# Altium PCB PCBMain.PcbDoc
Units mm, origin at the board's own origin, x right, y up, seen from the top; angles counter-clockwise.
Board outline 60.25 x 110.25 mm, 2 copper layers (Top Layer, Bottom Layer); 105 components, 104 nets, 344 pads, 33 vias.
Unrouted connection lines stored in the file: 4.
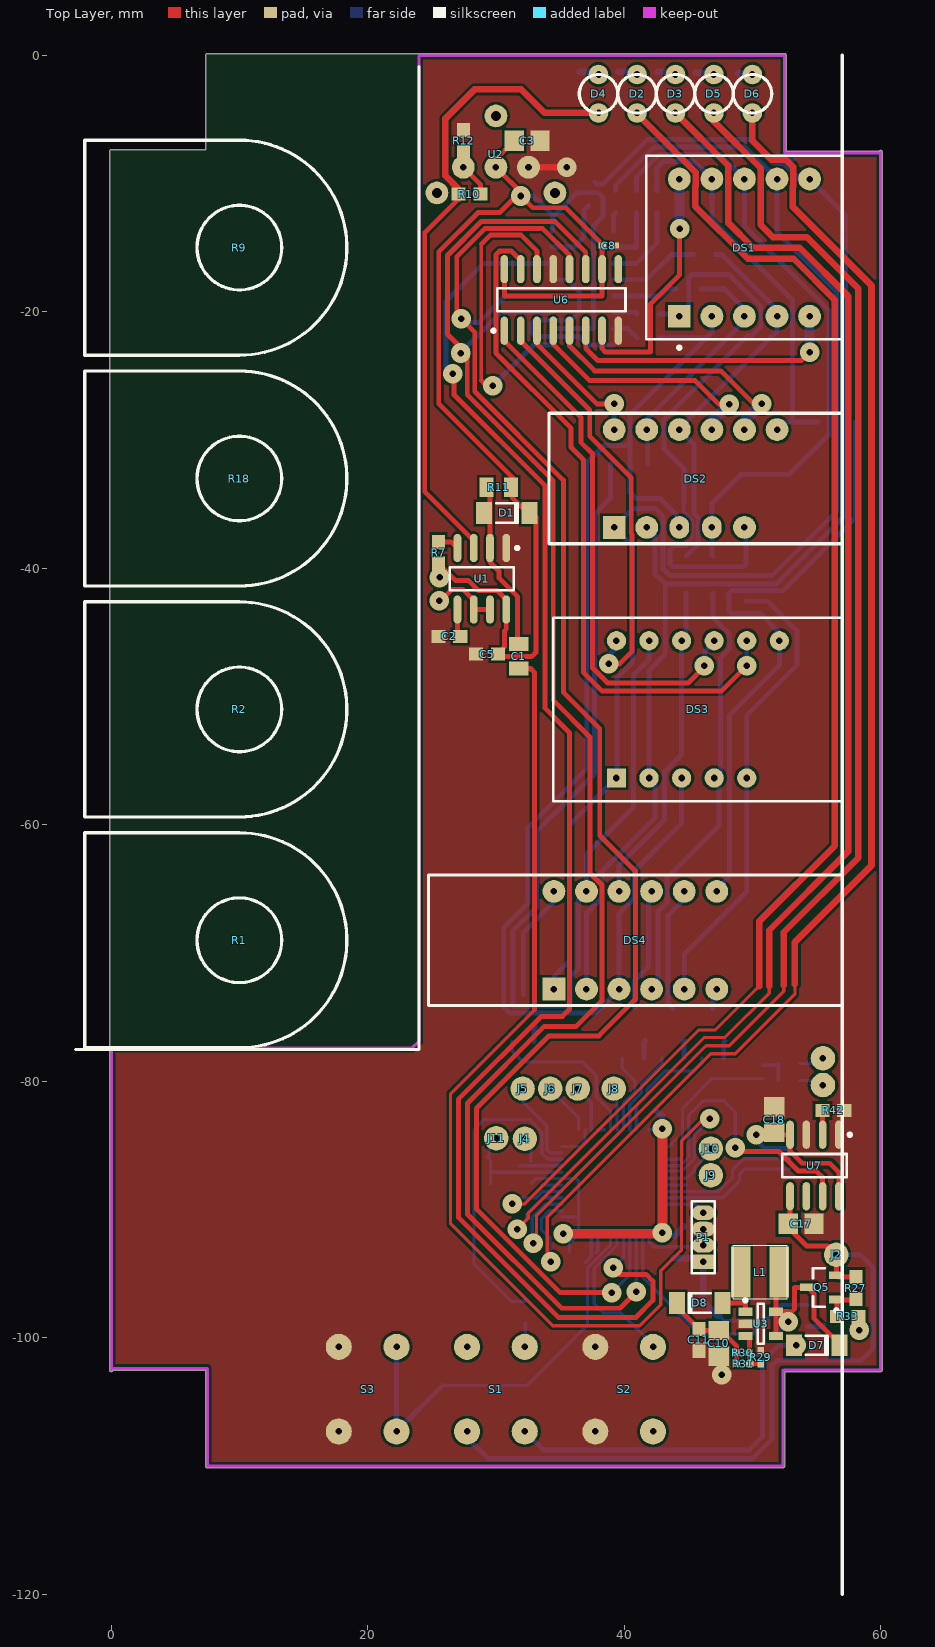
[diagram p0: Top Layer view]
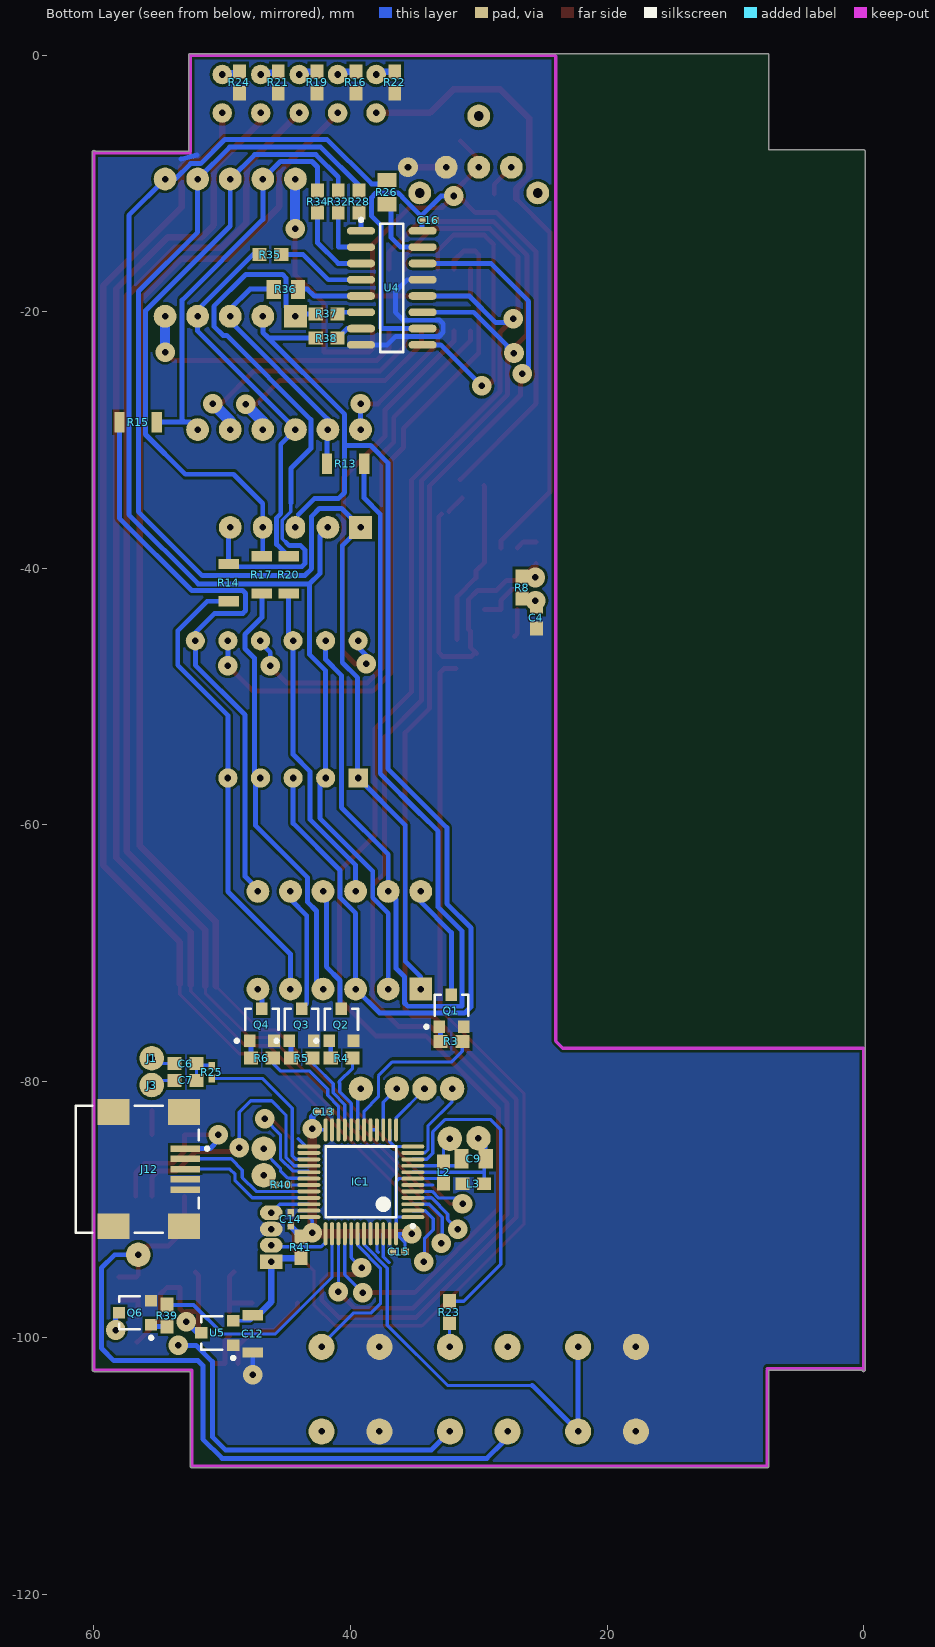
[diagram p1: Bottom Layer view, seen from below]

## Layer stack, top to bottom
Top Solder: solder mask 0.0102, Solder Resist, Dk 3.5
Top Layer: signal copper 0.0356
Dielectric 1: dielectric 0.32, FR-4, Dk 4.8
Bottom Layer: signal copper 0.0356
Bottom Solder: solder mask 0.0102, Solder Resist, Dk 3.5

## Board outline
7.373,-110 7.373,-102.507 0.127,-102.507 cw(c0,-102.5) -0.127,-102.5 -0.127,-7.5 cw(c0,-7.5) 0,-7.373 7.373,-7.373 7.373,0 cw(c7.5,0) 7.5,0.127 52.451,0.127 cw(c52.451,0) 52.475,0.125 52.476,0.125 cw(c52.5,0) 52.627,0 52.627,-7.493 59.886,-7.493 cw(c60,-7.549) 60.127,-7.549 60.127,-102.38 cw(c60,-102.38) 60.112,-102.44 cw(c60,-102.5) 60.127,-102.5 cw(c60,-102.5) 60,-102.627 52.507,-102.627 52.507,-110 cw(c52.38,-110) 52.38,-110.127 7.5,-110.127 cw(c7.5,-110)

## Design rules (kind name [scope] priority, off if disabled: settings)
Clearance [All] p1: gap=0.127 except(0.216: Arc-Poly Track-Poly SMDPad-Poly THPad-Poly Via-Poly Fill-Poly Poly-Poly)
ComponentClearance [All] p1 off: gap=0.254 collisioncheckmode=3 verticalgap=0.254 showdistances=FALSE
PlaneConnect [All] p1: planeconnectstyle=Direct reliefexpansion=0.508 reliefentries=4 reliefconductorwidth=0.254 reliefairgap=0.254
PolygonConnect [All] p1: connectstyle=Direct reliefconductorwidth=0.254 reliefentries=4 polygonreliefangle="90 Angle" airgapwidth=0.254
RoutingVias [All] p1: holewidth=0.508 width=1.524 viastyle="Through Hole" minholewidth=0.508 minwidth=1.524 maxholewidth=0.508 maxwidth=1.524
SolderMaskExpansion [All] p1: expansion=0.102
Width [All] p1: maxlimit=3.81 minlimit=0.203 preferedwidth=0.381
28 further rules are at their usual default settings.

## Components (designator, comment, footprint, x,y, rotation, side; value= is the part's Value field where it differs from the comment)
C1 "Cap" 0805x 31.775,-46.863 r90 top
C2 "Cap" ERA-0603 26.365,-45.314 r0 top
C3 "Cap" 1206xx 32.436,-6.68 r0 top
C4 "Cap" ERA-0603 25.502,-43.84 r270 bottom
C5 "Cap" ERA-0603 29.312,-46.685 r180 top
C6 "Cap" ERA-0603 52.857,-78.613 r180 bottom
C7 "Cap" ERA-0603 52.857,-79.934 r180 bottom
C8 "Cap" 0402 38.811,-14.834 r0 top
C9 "Cap" 0805x 30.404,-86.03 r180 bottom
C10 "Cap" 1206xx 47.371,-100.432 r270 top
C11 "Cap" ERA-0603 45.822,-100.152 r270 top
C12 "Cap" 1206x 47.625,-99.695 r270 bottom
C13 "Cap" 0402 42.088,-82.372 r180 bottom
C14 "Cap" 0402 44.653,-90.754 r90 bottom
C15 "Cap" 0402 36.246,-93.294 r0 bottom
C16 "Cap" 0402 33.934,-12.852 r180 bottom
C17 "Cap" 1206xx 53.797,-91.11 r0 top
C18 "Cap" 1206xx 51.689,-82.982 r90 top
D1 "Diode" SOD80C 30.861,-35.687 r0 top
D2 "Diode" LED3mm 41,-3 r90 top
D3 "Diode" LED3mm 44,-3 r90 top
D4 "Diode" LED3mm 38,-3 r90 top
D5 "Diode" LED3mm 47,-3 r90 top
D6 "Diode" LED3mm 50,-3 r90 top
D7 "Diode" SOD80C 55.016,-100.584 r0 top
D8 "Diode" SOD80C 45.898,-97.282 r180 top
DS1 "RED" HDSM-577 49.377,-15 r0 top
DS2 "RED" 7seg_3x_small 45.57,-33 r0 top
DS3 "GREEN" 7SEG_3X_MEDIUM 45.749,-51 r0 top
DS4 "GREEN" 7seg_4x_small 40.871,-69 r0 top
IC1 "STM32F103C6T6" TQFP48_N 39.192,-87.833 r0 bottom
J1 "Socket" PAD#1 55.499,-78.207 r180 bottom
J2 "Socket" PAD#1 56.54,-93.523 r0 top
J3 "Socket" PAD#1 55.499,-80.289 r180 bottom
J4 "Socket" PAD#1 32.258,-84.48 r90 top
J5 "Socket" PAD#2 32.08,-80.569 r0 top
J6 "Socket" PAD#2 34.231,-80.569 r0 top
J7 "Socket" PAD#2 36.381,-80.569 r0 top
J8 "Socket" PAD#2 39.192,-80.569 r0 top
J9 "Socket" PAD#1 46.761,-87.325 r0 top
J10 "Socket" PAD#1 46.761,-85.242 r0 top
J11 "Socket" PAD#1 30.023,-84.43 r90 top
J12 "440247-1" 440247 60.731,-86.843 r0 bottom
L1 "Inductor" IND_SMD_1 50.597,-94.869 r180 top
L2 "Res1" ERA-0603 32.741,-87.097 r270 bottom
L3 "Res1" ERA-0603 30.429,-87.986 r180 bottom
P1 "Header 4" MHDR1X4 46.177,-94.056 r90 top
Q1 "BC847ALT1" 318-08 32.131,-74.498 r180 bottom
Q2 "BC847ALT1" 318-08 40.716,-75.59 r180 bottom
Q3 "BC847ALT1" 318-08 43.815,-75.59 r180 bottom
Q4 "BC847ALT1" 318-08 46.914,-75.59 r180 bottom
Q5 "IRLML5103" SOT-23_N 55.423,-96.063 r180 top
Q6 "BC847ALT1" 318-08 56.794,-98.044 r90 bottom
R1 "Res Tap" RES_VAR_MEDIUM 10,-69 r90 top
R2 "Res Tap" RES_VAR_MEDIUM 10,-51 r90 top
R3 "Res1" ERA-0603 32.131,-76.886 r0 bottom
R4 "Res1" ERA-0603 40.691,-78.181 r0 bottom
R5 "Res1" ERA-0603 43.802,-78.181 r0 bottom
R6 "Res1" ERA-0603 46.914,-78.181 r0 bottom
R7 "Res1" ERA-0603 25.527,-38.786 r270 top
R8 "Res1" ERA-0603 26.619,-41.504 r270 bottom
R9 "Res Tap" RES_VAR_MEDIUM 10,-15 r90 top
R10 "Res1" ERA-0603 27.94,-10.82 r180 top
R11 "Res1" 0805x 30.226,-33.68 r180 top
R12 "Res1" ERA-0603 27.483,-6.68 r270 top
R13 "Res1" 1206x 40.386,-31.852 r0 bottom
R14 "Res1" 1206x 49.505,-41.123 r90 bottom
R15 "Res1" 1206x 56.566,-28.6 r180 bottom
R16 "Res1" ERA-0603 39.58,-2.108 r270 bottom
R17 "Res1" 1206x 46.914,-40.513 r90 bottom
R18 "Res Tap" RES_VAR_MEDIUM 10,-33 r90 top
R19 "Res1" ERA-0603 42.608,-2.108 r270 bottom
R20 "Res1" 1206x 44.831,-40.513 r90 bottom
R21 "Res1" ERA-0603 45.637,-2.108 r270 bottom
R22 "Res1" ERA-0603 36.551,-2.108 r90 bottom
R23 "Res1" ERA-0603 32.283,-97.993 r90 bottom
R24 "Res1" ERA-0603 48.666,-2.108 r270 bottom
R25 "Res1" 0402 50.825,-79.273 r270 bottom
R26 "Res1" 0805x 37.16,-10.668 r270 bottom
R27 "Res1" ERA-0603 58.064,-96.114 r270 top
R28 "Res1" ERA-0603 39.336,-11.405 r90 bottom
R29 "Res1" 0402 50.648,-101.498 r270 top
R30 "Res1" 0402 49.251,-101.168 r180 top
R31 "Res1" 0402 49.276,-102.006 r180 top
R32 "Res1" ERA-0603 40.953,-11.405 r90 bottom
R33 "Res1" ERA-0603 57.429,-98.323 r180 top
R34 "Res1" ERA-0603 42.57,-11.405 r90 bottom
R35 "Res1" ERA-0603 46.253,-15.545 r0 bottom
R36 "Res1" 0805x 45.034,-18.263 r180 bottom
R37 "Res1" ERA-0603 41.859,-20.168 r0 bottom
R38 "Res1" ERA-0603 41.859,-22.047 r0 bottom
R39 "Res1" ERA-0603 54.305,-98.273 r90 bottom
R40 "Res1" 0402 45.39,-88.062 r0 bottom
R41 "Res1" ERA-0603 43.866,-92.939 r90 bottom
R42 "Res1" ERA-0603 56.312,-82.271 r180 top
S1 "SW-SPST" BTN_STD 30,-104 r90 top
S2 "SW-SPST" BTN_STD 40,-104 r90 top
S3 "SW-SPST" BTN_STD 20,-104 r90 top
U1 "LMC555CM" M08A_N 28.905,-40.818 r270 top
U2 "optolink" optolink 30,-8.73 r0 top
U3 "LT1931AES5#TR" S5-T_N 50.648,-98.908 r0 top
U4 "SN74HC595D" D016_N 36.779,-18.136 r180 bottom
U5 "LM78M05CT" 318-08 50.394,-99.619 r90 bottom
U6 "SN74HC595D" D016_N 35.103,-19.075 r90 top
U7 "TP4056" NSO8_N 54.839,-86.563 r270 top

## Footprints (in the part's own frame and the unit in brackets; to place one, negate y for a bottom-side part, rotate by r counter-clockwise, add the part's x,y. Pads: shape width x height; smd on the part's side, far side on the other; paste and mask are expansions set on the pad)
7SEG_3X_MEDIUM [mm] "LED, 7-Segment Display, 9.2 mm, Dual Digit; 10 Leads; Row Space 10.7 mm; Pitch 2.54 mm"
  rect 1.5x1.5 hole 0.508 unplated: 1(-6.35,-5.35)
  round 1.5 hole 0.508 unplated: 2(-3.81,-5.35) 3(-1.27,-5.35) 4(1.27,-5.35) 5(3.81,-5.35) 7(6.35,5.35) 8(3.81,5.35) 9(1.27,5.35) 10(-1.27,5.35) 11(-3.81,5.35) 12(-6.35,5.35)
  silkscreen extent -11.28,-7.15 11.28,7.15
7seg_3x_small [mil]
  rect 70x70 hole 20 unplated: 1(-250,-150)
  round 70 hole 20 unplated: 2(-150,-150) 5(150,-150) 7(250,150) 8(150,150) 9(50,150) 10(-50,150) 11(-150,150) 12(-250,150)
  oval 60x70 hole 20 unplated: 3(-50,-150) 4(50,-150)
  silkscreen extent -450,-200 450,200, body extent -450,-200 450,200, height 228
7seg_4x_small [mil]
  rect 70x70 hole 20 unplated: 1(-250,-150)
  round 70 hole 20 unplated: 2(-150,-150) 3(-50,-150) 4(50,-150) 5(150,-150) 6(250,-150) 7(250,150) 8(150,150) 9(50,150) 10(-50,150) 11(-150,150) 12(-250,150)
  silkscreen extent -635,-200 635,200, body extent -635,-200 635,200, height 228
318-08 [mm] "SOT-23; 3 Leads; Body 3.0 x 2.6 mm, inc. leads (LxW max)"
  rect 0.9x0.95 smd: 1(-0.95,-1.25) 2(0.95,-1.25) 3(0,1.25)
  silkscreen extent -2.08,-1.37 1.3,1.25
0402 [mm] "Chip Capacitor, Body 1.0x0.5mm, IPC High Density"
  rect 0.6x0.5 smd: 1(-0.5,0) 2(0.5,0)
  body extent -0.55,-0.3 0.55,0.3, height 1.3
0805x [mm] "Chip Resistor; Body 2 x 1.3 mm (LxW typ)"
  rect 1.1x1.5 smd: 1(0.95,0) 2(-0.95,0)
1206x [mm]
  rect 0.8x1.6 smd: 1(-1.45,0) 2(1.45,0)
1206xx [mm]
  rect 1.5x1.6 smd: 1(-1,0) 2(1,0)
440247 [mm] "Connector; USB2.0, Type B, SM; 5 Position; Right Angle"
  rect 2.3x0.5 smd: 1(-7.85,-1.6) 2(-7.85,-0.8) 3(-7.85,0) 4(-7.85,0.8) 5(-7.85,1.6)
  rect 2.5x2 smd: 6(-7.75,4.45) 7(-2.25,4.45) 8(-7.75,-4.45) 9(-2.25,-4.45)
  round 0 all layers, no hole: MH1(-5.25,2.2) MH2(-5.25,-2.2)
  silkscreen extent -9.67,-4.95 0.7,4.95
BTN_STD [mil]
  round 80 hole 20 unplated: 1(-129.92,88.58) 1(129.92,88.58) 2(-129.92,-88.58) 2(129.92,-88.58)
D016_N [mm] "SOIC, 16-Leads, Body 9.9x3.9mm, Pitch 1.27mm, IPC Medium Density"
  oval 2.2x0.6 smd: 1(-2.4,4.445) 2(-2.4,3.175) 3(-2.4,1.905) 4(-2.4,0.635) 5(-2.4,-0.635) 6(-2.4,-1.905) 7(-2.4,-3.175) 8(-2.4,-4.445) 9(2.4,-4.445) 10(2.4,-3.175) 11(2.4,-1.905) 12(2.4,-0.635) 13(2.4,0.635) 14(2.4,1.905) 15(2.4,3.175) 16(2.4,4.445)
  silkscreen extent -2.53,-5 0.9,5.42, body extent -1.95,-4.95 1.95,4.95, height 1.75
ERA-0603 [mm] "Chip Resistor; Body 1.6 x 0.8 mm (LxW typ)"
  rect 1.1x1 smd: 1(-0.85,0) 2(0.85,0)
HDSM-577 [mil] "LED, 7-Segment Display, 9.2 mm, Dual Digit; 10 Leads; Row Space 10.7 mm; Pitch 2.54 mm"
  rect 70x70 hole 20 unplated: 1(-200,-210.63)
  round 70 hole 20 unplated: 2(-100,-210.63) 3(0,-210.63) 4(100,-210.63) 5(200,-210.63) 6(200,210.63) 7(100,210.63) 8(0,210.63) 9(-100,210.63) 10(-200,210.63)
  silkscreen extent -301,-312 301,281
IND_SMD_1 [mm]
  rect 1.5x4 smd: 1(-1.5,0) 2(1.5,0)
  silkscreen extent -2.1,-2.1 2.1,2.1, body extent -2.03,-2.03 2.03,2.03, height 2
LED3mm [mil]
  round 60 hole 20: 1(-59.06,0) 2(59.06,0)
  silkscreen extent -59,-59 59,59
M08A_N [mm] "SOIC, 8-Leads, Body 4.9x3.9mm, Pitch 1.27mm, IPC Medium Density"
  oval 2.2x0.6 smd: 1(-2.4,1.905) 2(-2.4,0.635) 3(-2.4,-0.635) 4(-2.4,-1.905) 5(2.4,-1.905) 6(2.4,-0.635) 7(2.4,0.635) 8(2.4,1.905)
  silkscreen extent -2.52,-2.5 0.9,2.88, body extent -2,-2.5 2,2.5, height 1.75
MHDR1X4 [mil] "Connector; Header; 4 Position"
  rect 45x70 hole 20: 1(0,0)
  oval 45x70 hole 20: 2(50,0) 4(150,0)
  oval 45x70 hole 20 unplated: 3(100,0)
  silkscreen extent -35,-35 185,35
NSO8_N [mm] "SOIC, 8-Leads, Body 4.9x3.9mm, Pitch 1.27mm, IPC Medium Density"
  oval 2.2x0.6 smd: 1(-2.4,1.905) 2(-2.4,0.635) 3(-2.4,-0.635) 4(-2.4,-1.905) 5(2.4,-1.905) 6(2.4,-0.635) 7(2.4,0.635) 8(2.4,1.905)
  silkscreen extent -2.52,-2.5 0.9,2.88, body extent -2,-2.5 2,2.5, height 1.75
optolink [mil]
  round 70 hole 20 unplated: 1(-100,0) 2(0,0) 3(100,0)
  round 70 hole 30: 4(-181.1,-78.74) 5(0,157.48) 5(181.1,-78.74)
PAD#1 [mil]
  round 75 hole 20: 1(0,0)
PAD#2 [mil]
  round 75 hole 20 unplated: 1(0,0)
RES_VAR_MEDIUM [mm]
  silkscreen extent -8.38,-8.38 8.38,12.06
S5-T_N [mm] "SOT23, 5-Leads, Body 3x1.6mm, Pitch 0.95mm, Lead Span 2.8mm, IPC Medium Density"
  rect 1.1x0.65 smd: 1(-1.2,0.95) 2(-1.2,0) 3(-1.2,-0.95) 4(1.2,-0.95) 5(1.2,0.95)
  silkscreen extent -1.32,-1.55 0.25,1.95, body extent -0.9,-1.55 0.9,1.55, height 1
SOD80C [mm] "Metal Electrode Face (MELF) Diode; Body 3.5 x 1.6 mm (LxDia)"
  rect 1.25x1.7 smd: 1(-1.775,0) 2(1.775,0)
  silkscreen extent -0.85,-0.75 0.85,0.75
SOT-23_N [mm] "SOT23, 3-Leads, Body 2.9x1.3mm, Pitch 0.95mm, Lead Span 2.3mm, IPC Medium Density"
  rect 1.15x0.6 smd: 1(-1.125,0.95) 2(-1.125,-0.95) 3(1.125,0)
  silkscreen extent -1.25,-1.5 0.7,1.92, body extent -0.7,-1.5 0.7,1.5, height 1.11
TQFP48_N [mm] "Thin QFP, 48-Leads, Body 7x7mm, Pitch 0.5mm, IPC Medium Density"
  oval 1.8x0.3 smd: 1(-4.05,2.75) 2(-4.05,2.25) 3(-4.05,1.75) 4(-4.05,1.25) 5(-4.05,0.75) 6(-4.05,0.25) 7(-4.05,-0.25) 8(-4.05,-0.75) 9(-4.05,-1.25) 10(-4.05,-1.75) 11(-4.05,-2.25) 12(-4.05,-2.75) 25(4.05,-2.75) 26(4.05,-2.25) 27(4.05,-1.75) 28(4.05,-1.25) 29(4.05,-0.75) 30(4.05,-0.25) 31(4.05,0.25) 32(4.05,0.75) 33(4.05,1.25) 34(4.05,1.75) 35(4.05,2.25) 36(4.05,2.75)
  oval 0.3x1.8 smd: 13(-2.75,-4.05) 14(-2.25,-4.05) 15(-1.75,-4.05) 16(-1.25,-4.05) 17(-0.75,-4.05) 18(-0.25,-4.05) 19(0.25,-4.05) 20(0.75,-4.05) 21(1.25,-4.05) 22(1.75,-4.05) 23(2.25,-4.05) 24(2.75,-4.05) 37(2.75,4.05) 38(2.25,4.05) 39(1.75,4.05) 40(1.25,4.05) 41(0.75,4.05) 42(0.25,4.05) 43(-0.25,4.05) 44(-0.75,4.05) 45(-1.25,4.05) 46(-1.75,4.05) 47(-2.25,4.05) 48(-2.75,4.05)
  silkscreen extent -4.17,-2.75 2.75,3.57, body extent -3.5,-3.5 3.5,3.5, height 1.2

## Part data
C1 C2 C3 C4 C5 C6 C7 C8 C9 C10 C11 C12 C13 C14 C15 C16 C17 C18: "Capacitor"
D1 D2 D3 D4 D5 D6 D7 D8: "Default Diode"
DS1: library part HDSM-577G, "9.2 mm Green 7-Segment Display: 2-Digit, RH DP"
DS2 DS3 DS4: library part HDSP-B42G, "14.22 mm Tinted Green, 18:88 4-Digit 7-Segment Display: CA, Neutral Gray Surface"
J12: "USB 2.0, Right Angle, SMT, B Type, Receptacle, 5 Position, Black"
L2 L3 R3 R4 R5 R6 R7 R8 R10 R11 R12 R13 R14 R15 R16 R17 R19 R20 R21 R22 R23 R24 R25 R26 R27 R28 R29 R30 R31 R32 R33 R34 R35 R36 R37 R38 R39 R40 R41 R42: "Resistor"
P1: "Header, 4-Pin"
Q1 Q2 Q3 Q4 Q6: "General Purpose Transistor NPN Silicon"
Q5: "HEXFET Power MOSFET"
R1 R2 R9 R18: "Tapped Resistor"
S1 S2 S3: "Single-Pole, Single-Throw Switch"
U1: "CMOS Timer, 8-pin Narrow SOIC"
U3: "2.2MHz Inverting Current Mode DC/DC Converter"
U4 U6: "8-Bit Shift Register with 3-State Output Registers"
U5: "3-Terminal Positive Voltage Regulators, 3-pin TO-220"

## Via types
v1: diameter 1.524, hole 0.508, Top Layer to Bottom Layer, 33 vias

## Nets (pads, with @x,y where several pads share a name; then routed paths per layer and width w, separated by ;. In a path a pad name is that pad's centre, name@x,y a point inside that pad or via, vN(x,y) a via of type N, cw(c..) or ccw(c..) an arc to the next point about the centre after c; other vN are vias at no path point)
1: DS1.10 U6.7 | length 19.7
  Top Layer w0.381: U6.7 38.278,-22.885 38.532,-23.139 42.062,-23.139 42.062,-19.38 44.323,-17.12 v1(44.323,-13.513)
  Bottom Layer w0.762: DS1.10 44.323,-9.676 v1(44.323,-13.513)
2: DS1.6 DS2.2 DS3.2 DS4.2 R26.2 | length 102.7
  Bottom Layer w0.381: DS4.2 37.061,-66.896 38.268,-65.69 38.268,-63.612 42.393,-59.487 42.393,-56.803 DS3.2 41.939,-55.362 41.935,-55.358 41.935,-47.981 43.205,-46.711 43.205,-41.224 ; R26.2@37.719,-9.906 37.846,-10.033 38.359,-10.033 41.839,-6.553 49.784,-6.553 51.674,-8.444 52.462,-8.444 53.668,-9.65 DS1.6 57.277,-12.47 57.277,-35.814 51.88,-41.212 ; DS2.2 42.393,-37.443 42.393,-40.411 43.205,-41.224 ; 51.892,-41.224 43.205,-41.224
3: DS1.7 DS2.1 DS3.1 DS4.1 R28.2 | length 106.8
  Bottom Layer w0.381: DS4.1 34.521,-71.854 35.728,-70.648 35.728,-60.022 DS3.1 39.446,-56.303 39.446,-48.539 40.64,-47.346 40.64,-38.23 DS2.1 40.699,-35.331 42.418,-35.331 43.028,-35.941 43.028,-40.03 43.561,-40.564 51.537,-40.564 ; R28.2 39.336,-10.143 42.316,-7.163 49.43,-7.163 DS1.7 51.917,-13.792 56.54,-18.415 56.54,-35.585 51.549,-40.576
4: DS1.8 DS2.4 R17.2 R32.2 | length 49.2
  Bottom Layer w0.381: R32.2 40.953,-9.491 42.697,-7.747 47.474,-7.747 DS1.8 49.377,-13.309 55.982,-19.914 55.982,-29.566 52.883,-32.664 49.124,-32.664 46.84,-34.948 DS2.4 46.84,-38.989 R17.2
5: DS1.9 DS2.7 R15.2 R34.2 | length 31.9
  Bottom Layer w0.381: R34.2 42.57,-8.712 43.002,-8.28 45.467,-8.28 DS1.9 46.837,-12.801 53.124,-19.088 53.124,-28.436 52.959,-28.6 ; DS2.7 52.51,-28.6 52.959,-28.6 ; R15.2 52.959,-28.6
5V: C3.1 C5.1 C8.1 C16.1 D1.2 R7.2 R8.1 R11.2 U1.8 U2.2 U4.10 U4.16 U6.10 U6.16 | length 106.6
  Top Layer w0.381: v1@25.527,-40.716 R7.2 26.836,-40.945 27.838,-40.945 28.626,-41.732 30.099,-41.732 30.81,-42.443 U1.8 30.81,-44.741 30.658,-44.894 30.658,-46.15 C5.1@30.173,-46.634 ; C5.1@30.263,-46.545 30.607,-46.888 32.791,-46.888 33.122,-46.558 33.122,-35.989 D1.2@32.893,-35.76 ; U6.16 30.658,-18.771 38.278,-18.771 U6.10 38.278,-14.732 35.433,-11.887 32.868,-11.887 v1(31.953,-10.973) ; 31.305,-34.53 D1.2@32.334,-35.56 ; C3.1 30,-8.116 U2.2 32.243,-10.973 v1(31.953,-10.973) ; R11.2@31.458,-33.084 25.54,-27.165 25.54,-15.329 28.6,-12.268 30.277,-12.268 31.572,-10.973 v1(31.953,-10.973)
  Bottom Layer w0.381: v1(31.953,-10.973) 32.935,-10.973 34.433,-12.471 34.433,-13.636 U4.16 ; U4.10 37.592,-21.311 37.617,-21.285 37.617,-13.284 38.354,-12.548 38.354,-11.1 38.228,-10.974 38.228,-10.936 38.01,-10.719 36.297,-10.719 35.941,-11.074 35.941,-11.1 34.569,-12.471 34.434,-12.471
  other v1: 25.603,-40.716
6: DS1.4 DS2.10 R20.2 R35.2 | length 30
  Bottom Layer w0.381: R20.2 45.761,-38.134 45.761,-36.063 45.443,-35.745 45.443,-30.333 DS2.10 44.3,-29.131 51.917,-21.514 DS1.4 51.917,-19.837 47.625,-15.545 R35.2
7: DS1.3 DS2.11 R13.2 R36.2 | length 19.3
  Bottom Layer w0.381: R13.2 41.836,-29.266 DS2.11 41.76,-28.369 49.377,-20.752 DS1.3 49.377,-19.776 47.838,-18.237 46.01,-18.237 R36.2
8: DS1.1 DS2.5 R14.2 R37.2 | length 46.3
  Bottom Layer w0.254: 44.653,-34.9 44.653,-35.599 45.316,-36.262 45.316,-37.691 45.009,-37.998
  Bottom Layer w0.381: R37.2 44.115,-20.168 DS1.1 45.034,-19.613 45.034,-17.348 45.288,-17.094 48.158,-17.094 50.648,-19.583 50.648,-21.133 49.94,-21.841 49.66,-21.841 43.094,-28.407 43.094,-30.663 44.653,-32.222 44.653,-34.9 ; 45.009,-37.998 44.78,-38.227 43.891,-38.227 43.561,-38.557 43.561,-39.649 43.79,-39.878 49.299,-39.878 R14.2 49.505,-36.935 DS2.5
10: DS1.5 U6.6 | length 22.3
  Top Layer w0.381: U6.6 37.008,-22.86 37.948,-23.8 53.796,-23.8 v1(54.457,-23.139)
  Bottom Layer w0.762: v1(54.457,-23.139) DS1.5
11: DS2.8 U6.5 | length 20.6
  Top Layer w0.381: U6.5 35.738,-22.657 37.694,-24.613 47.523,-24.613 50.089,-27.178 v1(50.724,-27.178)
  Bottom Layer w0.381: DS2.8 DS2.8@49.38,-28.522
  Bottom Layer w0.889: DS2.8@49.38,-28.522 v1(50.724,-27.178)
12: DS2.9 U6.4 | length 19.2
  Top Layer w0.381: U6.4 34.468,-22.53 37.287,-25.349 45.517,-25.349 47.371,-27.203 v1(48.184,-27.203)
  Bottom Layer w0.381: DS2.9 DS2.9@46.84,-28.547
  Bottom Layer w0.889: DS2.9@46.84,-28.547 v1(48.184,-27.203)
13: DS2.12 U6.3 | length 11.7
  Top Layer w0.381: U6.3 33.198,-22.504 37.869,-27.176 v1(39.22,-27.176) ; DS2.12 DS2.12@39.22,-28.527
  Bottom Layer w0.381: DS2.12 v1(39.22,-27.176)
14: DS3.12 U6.2 | length 33.1
  Top Layer w0.381: U6.2 31.928,-22.276 37.313,-27.661 37.313,-29.693 40.554,-32.934 40.554,-37.31 40.615,-37.371 40.615,-46.482 39.649,-47.447 v1(38.786,-47.447)
  Bottom Layer w0.381: v1@38.76,-47.473 v1(38.786,-47.447) 38.583,-47.244 38.583,-46.99 39.399,-46.173 DS3.12
15: DS3.9 U6.1 | length 41.2
  Top Layer w0.381: U6.1 30.658,-22.25 36.627,-28.219 36.627,-30.175 37.541,-31.09 37.541,-47.777 38.71,-48.946 44.983,-48.946 46.253,-47.676 v1(46.253,-47.6)
  Bottom Layer w0.381: v1(46.253,-47.6) 46.253,-46.558 47.019,-45.792 DS3.9
16: DS3.8 U6.15 | length 54.5
  Top Layer w0.381: U6.15 31.928,-16.002 31.184,-15.258 30.284,-15.258 29.997,-15.545 29.997,-23.216 35.865,-29.083 35.865,-30.582 36.843,-31.559 36.843,-48.146 38.278,-49.581 47.574,-49.581 v1(49.559,-47.596)
  Bottom Layer w0.381: v1(49.559,-47.596) DS3.8
25: DS1.2 DS2.3 DS3.3 DS4.3 R38.2 | length 102.5
  Bottom Layer w0.381: R38.2 46.38,-22.047 46.837,-21.591 ; 44.069,-35.814 42.824,-34.569 40.945,-34.569 40.462,-34.087 40.462,-30.429 ; DS3.3 44.479,-59.889 40.808,-63.561 40.808,-65.69 39.601,-66.896 DS4.3 37.735,-74.676 31.09,-74.676 30.607,-74.193 30.607,-68.021 32.487,-66.142 32.487,-60.223 37.084,-55.626 37.084,-31.775 38.43,-30.429 40.462,-30.429 ; DS1.2 46.837,-21.591 ; 40.462,-30.429 40.462,-27.991 46.837,-21.616 46.837,-21.591
26: DS4.12 Q1.3 | length 9
  Bottom Layer w0.381: Q1.3 32.131,-68.402 34.521,-66.012 DS4.12
27: DS4.9 Q2.3 | length 9.6
  Bottom Layer w0.381: Q2.3@40.818,-74.239 40.818,-72.136 41.885,-71.069 41.885,-65.446 DS4.9
28: DS4.8 Q3.3 | length 9.8
  Bottom Layer w0.381: Q3.3 43.409,-73.934 43.409,-67.081 44.681,-65.809 DS4.8
29: DS4.6 Q4.3 | length 1.7
  Bottom Layer w0.381: Q4.3 46.914,-73.117 DS4.6
1000: IC1.45 | length 1.5
  Bottom Layer w0.254: 37.823,-93.332 37.942,-93.213 IC1.45
1001: IC1.46 | length 2.4
  Bottom Layer w0.254: 36.982,-94.132 37.442,-93.673 IC1.46
1002: IC1.25 | length 1.1
  Bottom Layer w0.254: IC1.25 43.466,-85.083 44.069,-84.48
1003: IC1.26
1004: IC1.6 | length 1.6
  Bottom Layer w0.254: 33.575,-88.083 IC1.6
AUD_IN: IC1.27 R25.2 | length 12.4
  Bottom Layer w0.254: IC1.27 44.27,-86.083 44.552,-85.801 44.552,-82.093 46.871,-79.773 R25.2
B1: IC1.42 S2.2 | length 12.3
  Bottom Layer w0.254: IC1.42 39.442,-92.79 37.668,-94.564 37.668,-94.945 37.668,-97.333 38.405,-98.069 39.776,-98.069 S2.2@42.25,-100.543
  Bottom Layer w0.381: S2.2@42.25,-100.7 S2.2@42.25,-100.543
B2: IC1.43 S3.2 | length 32.8
  Bottom Layer w0.254: 25.842,-103.708 32.436,-103.708 37.135,-99.009 37.135,-94.559 38.942,-92.751 IC1.43
  Bottom Layer w0.381: S3.2@22.25,-100.7 22.25,-107.3 25.842,-103.708
BAT: C17.1 J2.1 Q5.2 R27.1 S1.1 U7.5 | length 58.9
  Top Layer w0.381: U7.5 52.934,-91.55 54.221,-92.837 55.855,-92.837 J2.1 56.548,-93.53 Q5.2 ; Q5.2@56.699,-95.264 R27.1
  Bottom Layer w0.381: S1.1@27.53,-108.08 28.045,-108.08 29.362,-109.398 50.013,-109.398 51.511,-107.899 51.511,-102.159 51.892,-101.778 58.445,-101.778 59.411,-100.813 59.411,-94.539 58.395,-93.523 J2.1
BTN0: IC1.10 R23.2 | length 25.1
  Bottom Layer w0.254: R23.2 31.179,-97.143 28.296,-94.259 28.296,-83.769 29.096,-82.969 32.601,-82.969 33.579,-83.947 33.579,-85.598 34.064,-86.083 IC1.10
C1: IC1.18 R3.1 | length 12.8
  Bottom Layer w0.254: R3.1 31.281,-77.661 32.106,-78.486 36.728,-78.486 37.821,-79.578 37.821,-81.204 38.942,-82.325 IC1.18
C2: IC1.20 R4.1 | length 6.4
  Bottom Layer w0.254: R4.1 39.841,-78.982 40.869,-80.01 40.869,-80.126 40.843,-80.152 40.843,-80.823 39.942,-81.724 IC1.20
C3: IC1.21 R5.1 | length 6.6
  Bottom Layer w0.254: IC1.21 40.442,-81.808 41.351,-80.899 41.351,-80.182 42.729,-78.804 42.735,-78.804 42.952,-78.587 R5.1
C4: IC1.22 R6.1 | length 9
  Bottom Layer w0.254: IC1.22 40.942,-81.943 41.783,-81.102 41.783,-80.62 43.217,-79.185 45.478,-79.185 46.064,-78.599 R6.1
CHRG_SNS: IC1.28 U7.7 | length 21.8
  Top Layer w0.381: v1(48.666,-85.166) 48.971,-85.471 52.07,-85.471 53.594,-86.995 54.991,-86.995 55.474,-87.478 U7.7
  Bottom Layer w0.254: IC1.28 44.379,-86.583 45.034,-85.928 45.034,-82.626 46.152,-81.509 47.777,-81.509 48.666,-82.398 v1(48.666,-85.166)
DAT: IC1.41 U4.14 | length 116.5
  Top Layer w0.381: v1(26.619,-24.841) 26.568,-24.841 26.746,-25.019 26.746,-26.492 33.833,-33.579 33.833,-50.902 35.738,-52.807 35.738,-74.371 35.179,-74.93 33.553,-74.93 27.076,-81.407 27.076,-90.602 34.874,-98.4 40.919,-98.4 42.24,-97.079 42.24,-95.58 41.707,-95.047 39.649,-95.047 v1(39.141,-94.539)
  Bottom Layer w0.254: v1(39.141,-94.539) 39.942,-93.738 IC1.41
  Bottom Layer w0.381: v1(26.619,-24.841) 26.111,-24.333 26.111,-19.177 29.058,-16.231 U4.14
DM: IC1.32 J12.2 | length 11
  Bottom Layer w0.254: IC1.32 47.358,-88.583 48.438,-87.503 48.438,-86.919 49.314,-86.043 J12.2
DP: IC1.33 J12.3 | length 10.9
  Bottom Layer w0.254: IC1.33 47.67,-89.083 48.997,-87.757 48.997,-87.249 49.403,-86.843 J12.3
EN_PWR: IC1.38 R39.2 | length 19
  Bottom Layer w0.254: IC1.38 41.442,-95.29 45.847,-99.695 49.962,-99.695
  Bottom Layer w0.305: 49.962,-99.695 52.234,-97.423 R39.2
GND: C2.1 C3.2 C4.2 C5.2 C8.2 C10.2 C11.2 C12.2 C13.2 C14.2 C15.2 C16.2 C17.2 C18.2 IC1.23 IC1.35 IC1.44 IC1.47 J12.4 J12.5 J12.6 J12.7 J12.8 J12.9 L3.1 P1.3 Q1.2 Q2.2 Q3.2 Q4.2 Q6.2 R12.1 R16.2 R19.2 R21.2 R22.1 R24.2 R29.1 R42.1 S2.1 S3.1 U1.1 U2.3 U3.2 U4.8 U4.13 U5.1 U6.8 U6.13 U7.1 U7.3 | length 21.7
  Top Layer w0.508: U2.3 v1(35.517,-8.73)
  Bottom Layer w0.381: U4.13 35.585,-17.501 36.5,-18.415 36.5,-20.041 35.882,-20.658 33.323,-20.658 33.316,-20.65 33.045,-20.65 32.766,-20.93 32.766,-21.59 33.104,-21.928 35.435,-21.928 35.443,-21.92 36.474,-21.92 37.135,-22.581 U4.8 ; v1(47.625,-102.87) C12.2 ; 51.968,-7.772 53.213,-8.103
LD0: D2.1 IC1.5 | length 109.6
  Top Layer w0.254: v1(31.267,-89.56) 32.258,-89.56 45.822,-75.997 47.092,-75.997 50.521,-72.568
  Top Layer w0.508: D2.1 41,-4.557 45.567,-9.124 45.567,-10.201 45.542,-10.226 45.542,-11.786 49.632,-15.875 53.213,-15.875 56.413,-19.075 56.413,-61.646 50.521,-67.539 50.521,-72.568
  Bottom Layer w0.254: v1(31.267,-89.56) 31.725,-89.103 33.122,-89.103 33.642,-88.583 IC1.5
LD1: D3.1 IC1.4 | length 111.1
  Top Layer w0.254: v1(31.648,-91.542) 32.512,-90.678 32.512,-90.297 46.228,-76.581 47.854,-76.581 51.308,-73.127 51.308,-72.568
  Top Layer w0.508: D3.1 48.107,-8.607 48.107,-10.202 48.133,-10.228 48.133,-13.081 50.063,-15.011 53.696,-15.011 57.455,-18.771 57.455,-62.078 51.308,-68.224 51.308,-72.568
  Bottom Layer w0.254: v1(31.648,-91.542) 32.41,-90.78 32.41,-90.353 33.68,-89.083 IC1.4
LD2: D5.1 IC1.3 | length 110.7
  Top Layer w0.254: v1(32.918,-92.608) 33.172,-92.354 33.172,-90.424 46.38,-77.216 48.209,-77.216 52.451,-72.974 52.451,-72.492
  Top Layer w0.508: D5.1 47,-5.166 50.647,-8.813 50.647,-10.177 ; 50.648,-10.177 50.648,-13.233 51.587,-14.173 54.229,-14.173 58.268,-18.212 58.268,-62.56 52.451,-68.377 52.451,-72.492
  Bottom Layer w0.254: v1(32.918,-92.608) 32.842,-92.532 32.842,-90.602 33.861,-89.583 IC1.3
LD3: D6.1 IC1.2 | length 111.3
  Top Layer w0.254: v1(34.29,-94.056) 34.011,-93.777 34.011,-90.602 46.761,-77.851 48.666,-77.851 53.315,-73.203 53.315,-72.441
  Top Layer w0.508: D6.1 50,-6.668 51.46,-8.128 52.603,-8.128 53.187,-8.712 53.187,-10.201 53.162,-10.226 53.162,-11.836 59.284,-17.958 59.284,-63.17 53.315,-69.139 53.315,-72.441
  Bottom Layer w0.254: v1(34.29,-94.056) 34.225,-93.991 34.225,-92.239 33.553,-91.567 33.553,-90.703 34.174,-90.083 IC1.2
NetC1_1: C1.1 D1.1 R11.1 U1.2 | length 12.9
  Top Layer w0.381: R11.1@29.605,-33.553 29.54,-33.618 U1.2 29.54,-39.522 30.226,-40.208 30.226,-40.742 31.689,-42.205 C1.1@31.689,-45.542
NetC2_2: C2.2 U1.5 | length 2.2
  Top Layer w0.381: U1.5 27,-45.099 C2.2
NetC4_1: C4.1 R8.2 U1.6 U1.7 | length 5.4
  Top Layer w0.381: v1(25.578,-42.52) 25.705,-42.52 26.594,-41.631 27.407,-41.631 28.27,-42.494 U1.6 U1.7
NetC6_1: C6.1 J1.1 | length 2
  Bottom Layer w0.254: C6.1 55.093,-78.613 J1.1
NetC6_2: C6.2 C7.2 R25.1 | length 2.5
  Bottom Layer w0.254: R25.1@50.8,-78.74 C6.2@52.007,-78.74 ; C7.2 C6.2@52.007,-78.74 ; C6.2 C6.2@52.007,-78.74
NetC7_1: C7.1 J3.1 | length 1.9
  Bottom Layer w0.254: C7.1 55.143,-79.934 J3.1
NetC9_1: C9.1 IC1.8 J11.1 L3.2 | length 10.2
  Bottom Layer w0.254: C9.1@29.312,-85.888 C9.1 ; J11.1@29.454,-84.48 C9.1 ; IC1.8 29.579,-87.083 L3.2 29.579,-86.155 C9.1
NetC9_2: C9.2 IC1.9 J4.1 L2.1 | length 5.1
  Bottom Layer w0.254: 31.907,-86.583 IC1.9 ; J4.1@32.233,-84.607 32.741,-85.115 L2.1
NetC10_1: C10.1 C11.1 D8.2 R30.2 R31.2 | length 7.4
  Top Layer w0.381: D8.2 44.123,-97.603 C11.1 ; C11.1@45.951,-99.432 C10.1 47.565,-99.432 48.776,-100.643 R31.2
NetC18_1: C18.1 J12.1 U7.4 U7.8 | length 13.5
  Top Layer w0.381: v1(50.305,-84.163) U7.4 52.934,-85.446 53.873,-86.385 56.032,-86.385 56.744,-87.097 U7.8
  Bottom Layer w0.381: v1(50.305,-84.163) 50.305,-84.595 50.953,-85.243 J12.1
NetD2_2: D2.2 R16.1 | length 1.1
  Bottom Layer w0.508: R16.1@39.557,-1.27 D2.2@40.691,-1.27
NetD3_2: D3.2 R19.1 | length 1.1
  Bottom Layer w0.508: R19.1@42.576,-1.295 D3.2@43.688,-1.295
NetD4_1: D4.1 R10.2 U1.3 | length 50.2
  Top Layer w0.381: R10.2@27.09,-11.188 24.447,-13.83 24.447,-34.023 28.27,-37.846 U1.3
  Top Layer w0.508: R10.2@27.09,-11.188 R10.2 27.09,-10.428 26.06,-9.398 26.06,-4.928 28.321,-2.667 31.979,-2.667 33.812,-4.5 D4.1
NetD4_2: D4.2 R22.2 | length 1.2
  Bottom Layer w0.508: R22.2@36.511,-1.295 D4.2@37.668,-1.295
NetD5_2: D5.2 R21.1 | length 1.1
  Bottom Layer w0.508: R21.1@45.545,-1.372 D5.2@46.634,-1.372
NetD6_2: D6.2 R24.1 | length 1
  Bottom Layer w0.508: R24.1@48.844,-1.397 D6.2@49.809,-1.397
NetD7_1: D7.1 R23.1 S1.2 | length 30.6
  Top Layer w0.381: v1(53.416,-100.584) D7.1@53.515,-100.683
  Bottom Layer w0.254: S1.2@32.25,-100.7 32.283,-100.667 R23.1
  Bottom Layer w0.381: S1.2@32.25,-107.3 33.687,-108.737 49.759,-108.737 50.775,-107.721 50.775,-101.854 52.045,-100.584 v1(53.416,-100.584)
NetD7_2: D7.2 L1.1 Q5.3 U3.4 U3.5 U5.3 | length 15.8
  Top Layer w0.381: U3.4 U3.5 ; L1.1 51.848,-95.118 U3.5 ; 52.807,-97.958 U3.5 ; 53.071,-97.958 53.291,-97.738 53.291,-96.063 Q5.3 54.813,-96.578 54.813,-98.501 D7.2@56.642,-100.33
  Bottom Layer w0.381: U5.3 51.943,-99.619 v1(52.807,-98.755)
NetD8_1: D8.1 L1.2 U3.1 | length 5.1
  Top Layer w0.254: 49.321,-97.282 49.448,-97.155
  Top Layer w0.381: D8.1 49.321,-97.282 ; L1.2 49.448,-95.22 49.448,-97.155 U3.1
NetDS3_4: DS3.4 DS4.4 R17.1 | length 34.2
  Bottom Layer w0.381: DS4.4 42.649,-72.302 42.649,-66.723 43.348,-66.025 43.348,-64.12 47.396,-60.071 47.396,-56.769 47.019,-56.392 DS3.4 47.498,-55.871 47.498,-46.993 48.226,-46.265 48.226,-45.15 46.914,-43.838 R17.1
NetDS3_5: DS3.5 DS4.5 R14.1 | length 36.5
  Bottom Layer w0.381: DS4.5 44.681,-70.076 49.559,-65.198 DS3.5 49.559,-51.456 53.467,-47.549 53.467,-44.856 51.183,-42.573 R14.1
NetDS3_7: DS3.7 DS4.7 R15.1 | length 47.9
  Bottom Layer w0.381: DS4.7 47.221,-65.022 48.226,-64.017 48.226,-51.418 52.099,-47.545 DS3.7 52.099,-45.013 50.597,-43.51 48.387,-43.51 48.184,-43.307 48.184,-41.961 48.412,-41.732 52.375,-41.732 58.016,-36.091 R15.1
NetDS3_10: DS3.10 DS4.10 R20.1 | length 25.4
  Bottom Layer w0.381: DS4.10 39.601,-63.142 43.146,-59.597 43.146,-55.85 44.479,-54.517 DS3.10 44.831,-45.298 R20.1
NetDS3_11: DS3.11 DS4.11 R13.1 | length 80.8
  Bottom Layer w0.381: R13.1 38.936,-34.521 37.685,-35.772 37.685,-56.016 34.544,-59.157 34.519,-59.157 33.172,-60.503 33.172,-66.421 31.321,-68.272 31.321,-74.146 35.532,-74.146 35.789,-73.889 35.789,-71.857 36.449,-71.196 36.449,-65.802 DS4.11 37.061,-62.304 40.716,-58.649 40.716,-48.336 41.939,-47.113 DS3.11
NetIC1_11: IC1.11 J5.1 | length 6.8
  Bottom Layer w0.254: J5.1 32.08,-81.585 33.96,-83.464 33.96,-85.344 34.199,-85.583 IC1.11
NetIC1_12: IC1.12 IC1.14 | length 2.9
  Bottom Layer w0.254: IC1.12 36.557,-85.083 36.942,-84.698 IC1.14
NetIC1_13: IC1.13 J6.1 | length 4.1
  Bottom Layer w0.254: J6.1 34.231,-80.637 36.442,-82.848 IC1.13
NetIC1_15: IC1.15 J7.1 | length 3.7
  Bottom Layer w0.254: J7.1 37.442,-81.63 IC1.15
NetIC1_16: IC1.16 IC1.17 | length 0.5
  Bottom Layer w0.254: IC1.16 IC1.17
NetIC1_19: IC1.19 J8.1 | length 3.3
  Bottom Layer w0.254: J8.1 39.442,-80.819 IC1.19
NetJ9_1: J9.1 R40.2
NetQ1_1: Q1.1 R3.2 | length 1.2
  Bottom Layer w0.381: R3.2 32.981,-75.848 Q1.1
NetQ2_1: Q2.1 R4.2 | length 1.4
  Bottom Layer w0.381: R4.2 41.541,-76.966 Q2.1
NetQ3_1: Q3.1 R5.2 | length 1.4
  Bottom Layer w0.381: R5.2 44.652,-76.953 Q3.1
NetQ4_1: Q4.1 R6.2 | length 1.4
  Bottom Layer w0.381: R6.2 47.764,-76.94 Q4.1
NetQ5_1: Q5.1 R27.2 R33.2 | length 2.8
  Top Layer w0.381: R33.2 56.579,-97.044 57.984,-97.044 R27.2
NetQ6_1: Q6.1 R39.1 | length 1.3
  Bottom Layer w0.381: R39.1 55.416,-99.123 Q6.1
NetQ6_3: Q6.3 R33.1 | length 2.6
  Top Layer w0.381: R33.1 58.279,-99.427 v1(58.318,-99.388)
  Bottom Layer w0.381: Q6.3 58.318,-98.318 v1(58.318,-99.388)
NetR7_1: R7.1 U1.4 | length 1.7
  Top Layer w0.381: R7.1 26.518,-37.936 U1.4
NetR10_1: R10.1 R12.2 U2.1 | length 2.6
  Top Layer w0.381: U2.1@27.456,-8.726 U2.1 28.79,-10.06 R10.1
NetR26_1: R26.1 U4.15 | length 5.4
  Bottom Layer w0.381: U4.15 36.093,-14.961 36.855,-14.199 36.855,-12.09 R26.1@37.205,-11.741
NetR28_1: R28.1 U4.1 | length 1.5
  Bottom Layer w0.381: U4.1 39.179,-12.412 R28.1
NetR29_2: R29.2 R30.1 R31.1 U3.3 | length 3.2
  Top Layer w0.381: U3.3 49.776,-100.186 R31.1 50.64,-102.006 R29.2
NetR32_1: R32.1 U4.2 | length 4.5
  Bottom Layer w0.381: U4.2 40.953,-14.961 R32.1
NetR34_1: R34.1 U4.3 | length 6.4
  Bottom Layer w0.381: U4.3 40.97,-16.231 42.57,-14.63 R34.1
NetR35_1: R35.1 U4.4 | length 7
  Bottom Layer w0.381: U4.4 41.732,-17.501 43.688,-15.545 R35.1
NetR36_1: R36.1 U4.5 | length 5.1
  Bottom Layer w0.381: U4.5 42.824,-18.771 43.358,-18.237 R36.1@44.084,-18.237
NetR37_1: R37.1 U4.6 | length 1.9
  Bottom Layer w0.381: U4.6 40.882,-20.041 R37.1
NetR38_1: R38.1 U4.7 | length 2.1
  Bottom Layer w0.381: U4.7 40.273,-21.311 R38.1
NetR42_2: R42.2 U7.2 | length 1.9
  Top Layer w0.381: R42.2 55.474,-82.282 U7.2
NetU4_9: U4.9 U6.14 | length 23.5
  Top Layer w0.305: 28.854,-25.349 28.854,-14.732
  Top Layer w0.381: 28.854,-25.349 v1@29.134,-25.629 ; 28.854,-14.732 29.566,-14.021 31.979,-14.021 33.198,-15.24 U6.14
  Bottom Layer w0.381: v1(29.769,-25.781) 32.969,-22.581 U4.9
OE: IC1.40 U4.12 U6.12 | length 125.4
  Top Layer w0.381: U6.12 35.738,-15.596 33.655,-13.513 29.134,-13.513 26.949,-15.697 26.949,-20.193 v1(27.305,-20.549) 28.346,-21.59 28.346,-26.213 35.255,-33.122 35.255,-49.657 38.1,-52.502 38.1,-60.833 40.869,-63.602 40.869,-73.609 38.024,-76.454 34.138,-76.454 28.473,-82.118 28.473,-89.941 35.001,-96.469 v1(39.04,-96.469)
  Bottom Layer w0.254: v1(39.04,-96.469) 40.442,-95.067 IC1.40
  Bottom Layer w0.381: v1@27.343,-20.841 28.664,-20.841 30.734,-18.771 U4.12
OUT_SIG: C1.2 IC1.29 | length 90.1
  Top Layer w0.254: 33.02,-74.422 26.467,-80.975 26.467,-91.11 34.417,-99.06 41.199,-99.06 42.85,-97.409 42.85,-94.767 44.475,-93.142 44.475,-84.646 46.191,-82.931 v1(46.685,-82.931)
  Top Layer w0.381: C1.2 32.7,-47.813 33.02,-48.133 33.02,-74.422
  Bottom Layer w0.254: IC1.29 43.338,-86.987 44.514,-86.987 45.466,-86.035 45.466,-84.15 v1(46.685,-82.931)
RX: IC1.31 R40.1 | length 1.7
  Bottom Layer w0.254: IC1.31 44.868,-88.083 R40.1
SCL: IC1.39 U4.11 U6.11 | length 128.9
  Top Layer w0.381: U6.11 37.008,-15.367 34.595,-12.954 28.88,-12.954 26.226,-15.608 26.226,-21.755 27.762,-23.292 27.762,-26.467 34.468,-33.172 34.468,-50.292 37.338,-53.162 37.338,-63.761 38.268,-64.69 38.268,-73.711 36.261,-75.717 33.782,-75.717 27.788,-81.712 27.788,-90.348 35.128,-97.688 39.675,-97.688 v1(40.942,-96.421)
  Bottom Layer w0.254: v1(40.942,-96.421) IC1.39
  Bottom Layer w0.381: v1@27.788,-22.885 27.788,-22.657 30.404,-20.041 U4.11
  other v1: 27.254,-23.216
SDCLK: IC1.37 P1.2 | length 5
  Bottom Layer w0.254: IC1.37 41.942,-92.539 42.296,-92.893 P1.2@46.177,-92.893
SWDIO: IC1.34 P1.4 | length 3.2
  Bottom Layer w0.254: IC1.34 45.514,-89.583 P1.4
TX: IC1.30 J10.1 | length 4.8
  Bottom Layer w0.254: IC1.30 43.242,-87.558 44.878,-87.558 45.466,-86.97 45.466,-86.766 46.761,-85.471 J10.1
VCC: C12.1 C13.1 C14.1 C15.1 IC1.1 IC1.7 IC1.24 IC1.36 IC1.48 L2.2 P1.1 R41.1 R41.2 U5.2 | length 42.3
  Top Layer w0.254: v1@42.914,-91.883 v1(42.981,-91.816)
  Top Layer w0.762: v1(35.241,-91.883) v1@42.914,-91.883 ; v1(42.981,-91.816) v1(42.981,-83.714)
  Bottom Layer w0.254: L2.2 33.104,-87.583 IC1.7 36.25,-87.583 36.442,-87.776 IC1.48 ; IC1.1 36.435,-90.583 ; v1(35.241,-91.883) IC1.48 ; C15.1 35.746,-92.58 IC1.48 ; IC1.24 v1@42.912,-83.783 ; v1(42.981,-91.816) 42.981,-90.844 IC1.36 ; C14.1@44.653,-91.301 C14.1 ; P1.1@45.91,-93.789 P1.1 ; C12.1@47.396,-98.273 47.793,-98.669 U5.2
  Bottom Layer w0.508: C13.1 42.981,-82.766 v1(42.981,-83.714) v1@42.912,-83.783 ; R41.1 P1.1@45.91,-93.789 ; R41.2 C14.1@44.653,-91.301 ; P1.1 46.177,-97.195 47.255,-98.273 C12.1@47.396,-98.273
pads on no net: J12.MH1 J12.MH2 U2.4 U2.5 U6.9 U7.6

## Polygon pours and split planes (outlines as drawn)
GND on Top Layer "Top Layer-GND" (solid, pour order 2): 7.373,-110 7.373,-102.507 0.127,-102.507 cw(c0,-102.5) -0.127,-102.5 -0.127,-77.419 cw(c0,-77.419) 0,-77.292 23.391,-77.292 23.876,-76.808 23.876,-0.051 cw(c24.003,-0.051) 23.942,0.061 cw(c24.054,0) 24.054,0.127 52.451,0.127 cw(c52.451,0) 52.475,0.125 52.476,0.125 cw(c52.5,0) 52.627,0 52.627,-7.493 59.886,-7.493 cw(c60,-7.549) 60.127,-7.549 60.127,-102.38 cw(c60,-102.38) 60.112,-102.44 cw(c60,-102.5) 60.127,-102.5 cw(c60,-102.5) 60,-102.627 52.507,-102.627 52.507,-110 cw(c52.38,-110) 52.38,-110.127 7.5,-110.127 cw(c7.5,-110)
GND on Bottom Layer "Top Layer-GND" (solid, pour order 0): 7.373,-110 7.373,-102.507 0.127,-102.507 cw(c0,-102.5) -0.127,-102.5 -0.127,-77.419 cw(c0,-77.419) 0,-77.292 23.391,-77.292 23.876,-76.808 23.876,-0.051 cw(c24.003,-0.051) 23.942,0.061 cw(c24.054,0) 24.054,0.127 52.451,0.127 cw(c52.451,0) 52.475,0.125 52.476,0.125 cw(c52.5,0) 52.627,0 52.627,-7.493 59.886,-7.493 cw(c60,-7.549) 60.127,-7.549 60.127,-102.38 cw(c60,-102.38) 60.112,-102.44 cw(c60,-102.5) 60.127,-102.5 cw(c60,-102.5) 60,-102.627 52.507,-102.627 52.507,-110 cw(c52.38,-110) 52.38,-110.127 7.5,-110.127 cw(c7.5,-110)

## Keep-outs
Keep-Out Layer:
  lines w0.254: 0,-102.5 0,-77.419 23.444,-77.419 24.003,-76.86 24.003,-0.051 ; 0,-102.38 7.5,-102.38 ; 7.5,-102.507 7.5,-102.5 7.5,-110 52.38,-110 52.38,-102.5 ; 24.054,0 52.451,0 ; 52.5,-102.5 60,-102.5 ; 52.5,-7.62 60,-7.62 ; 52.5,-7.493 52.5,-7.5 52.5,0 ; 60,-102.38 60,-7.549

## Silkscreen, mask and mechanical layers (free items; w line width, h text height)
Top Overlay:
  lines w0.254: -2.769,-77.509 24,-77.509 24,-0.886 ; 57,-120 57,0

## Text inside footprints (layer, text, board x,y; h text height)
J12: Mechanical 1 "PCB Edge" at 61.164,-82.806 h0.25 r90